# Altium PCB motor_driver_rev1.PcbDoc
Units mil, origin at the board's own origin, x right, y up, seen from the top; angles counter-clockwise.
Board outline 1417.32 x 1417.32 mil, 2 copper layers (Top Layer, Bottom Layer); 35 components, 30 nets, 146 pads, 59 vias.
Unrouted connection lines stored in the file: 1.
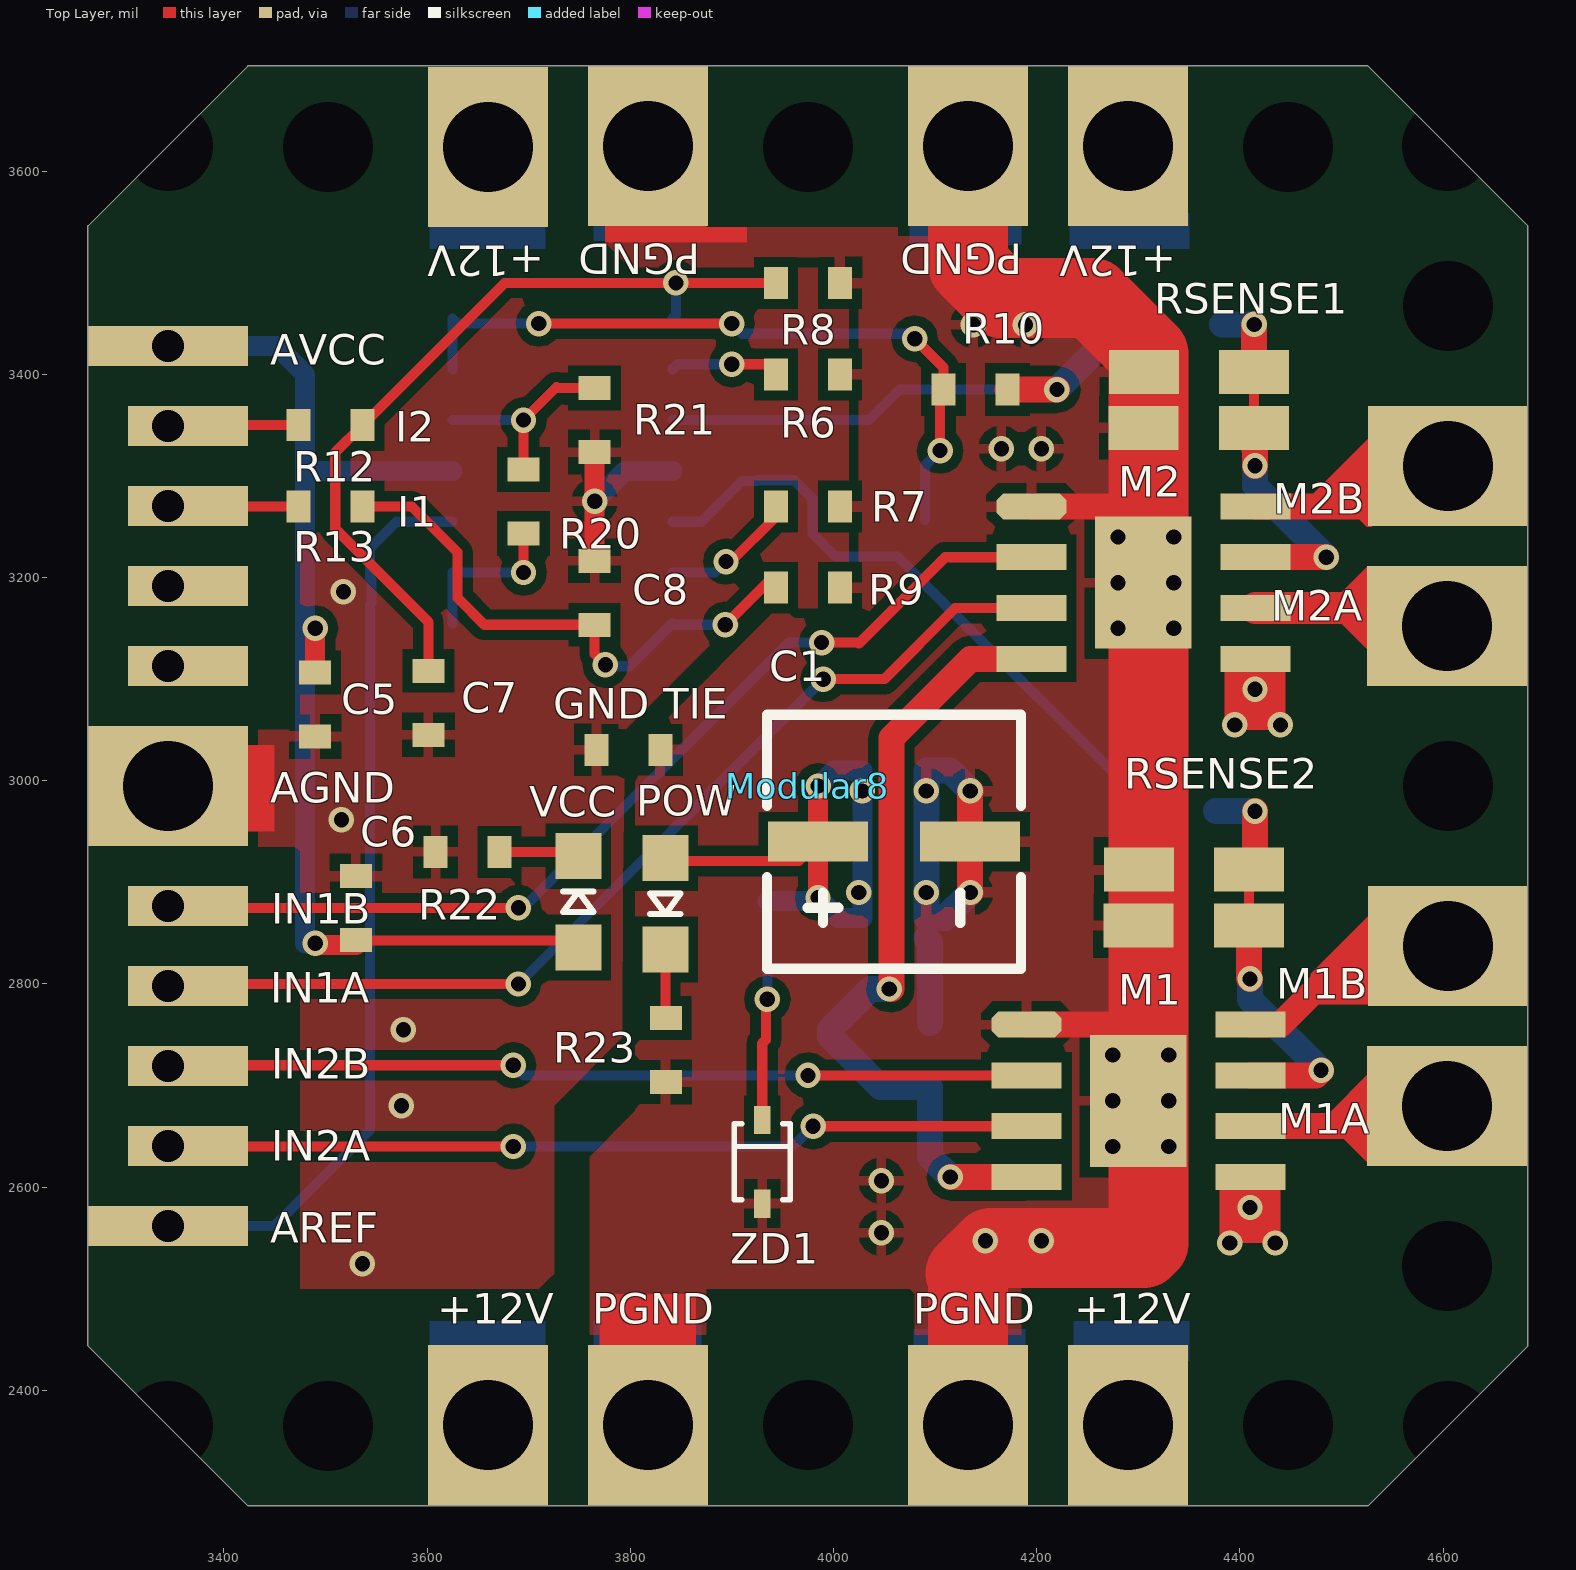
[diagram p0: Top Layer view]
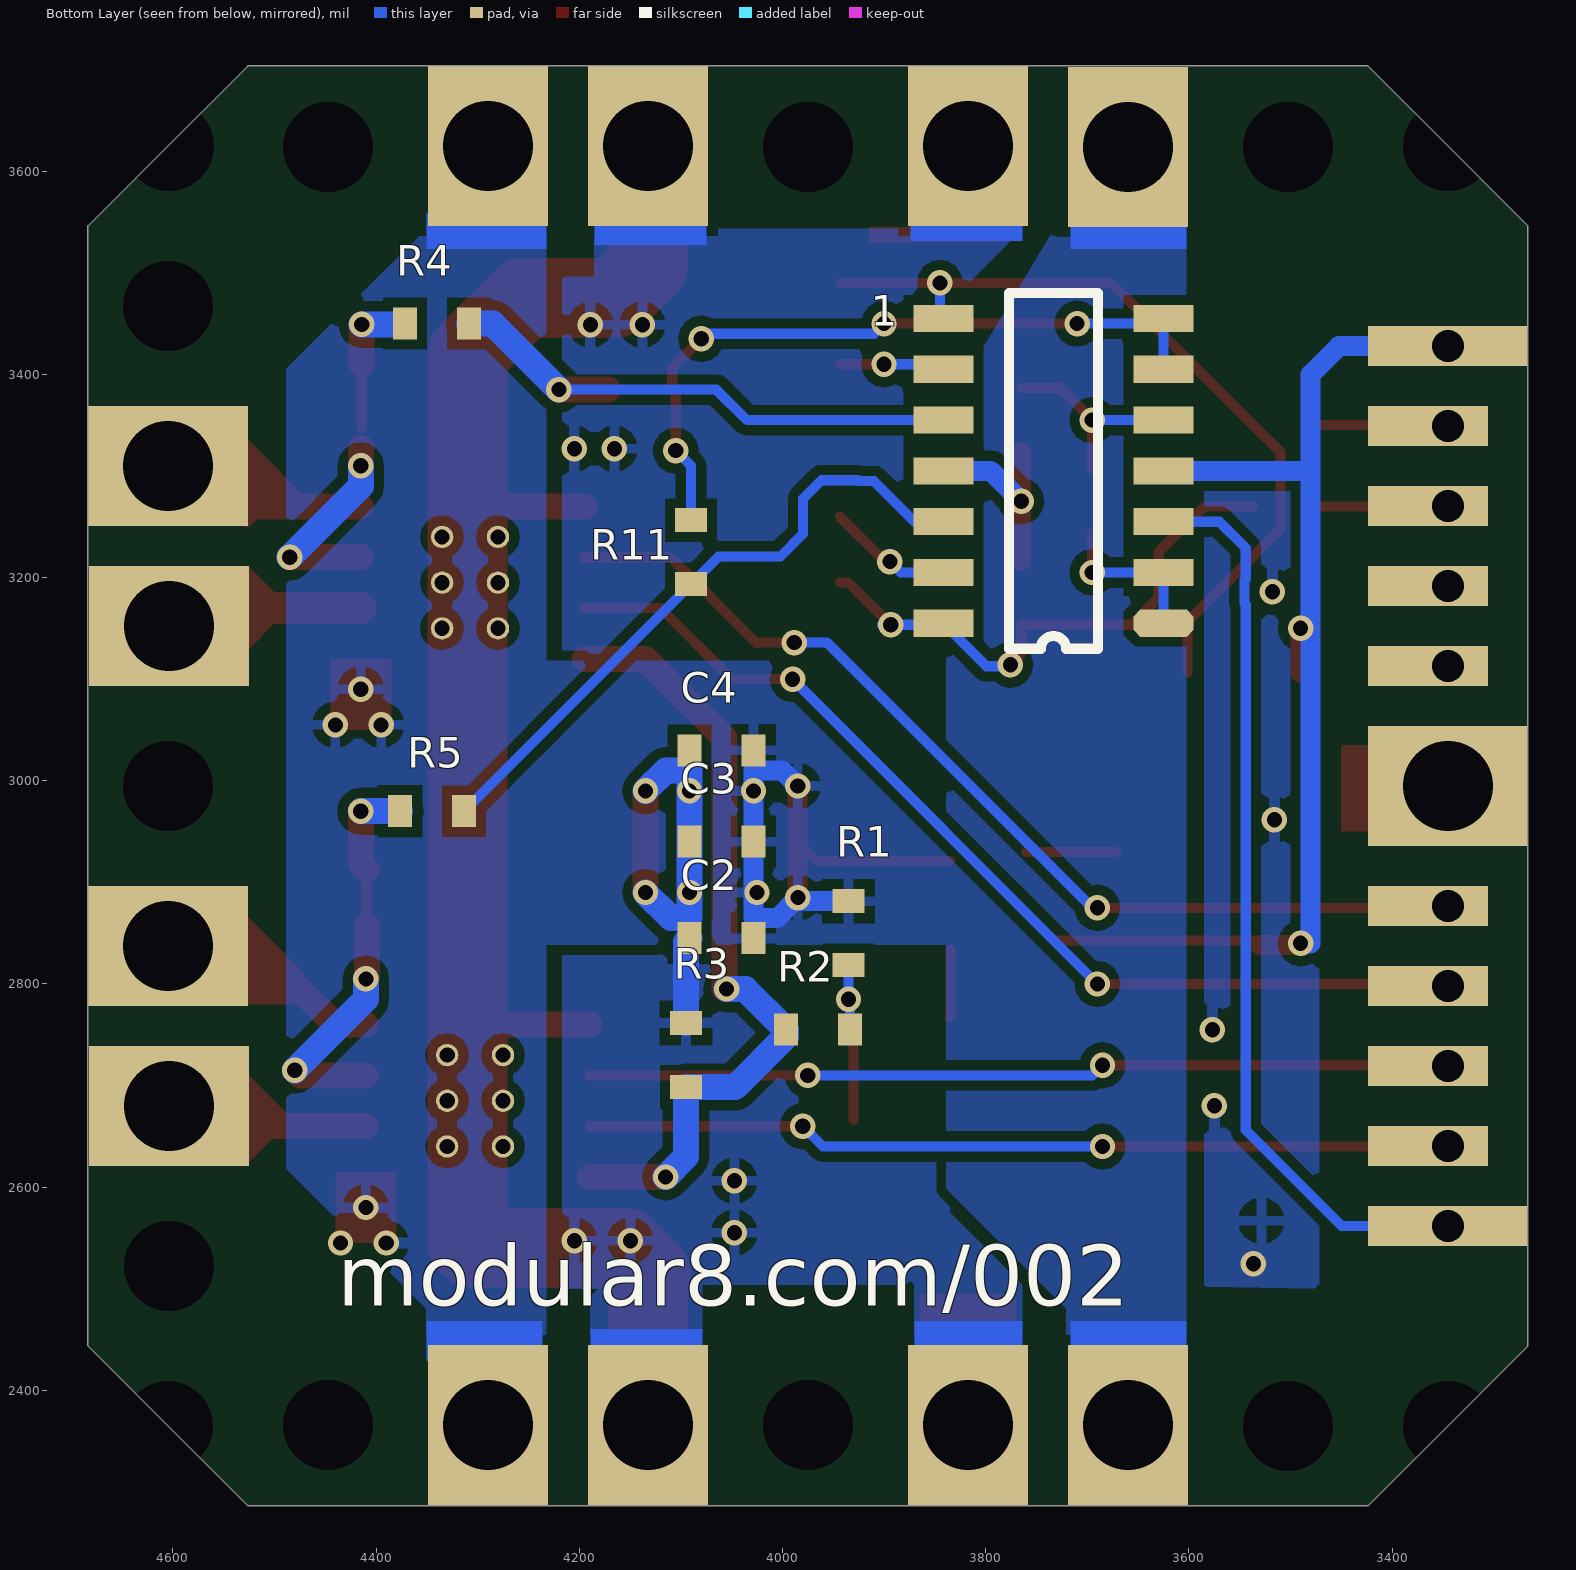
[diagram p1: Bottom Layer view, seen from below]

## Layer stack, top to bottom
Top Solder: solder mask 0.4, Solder Resist, Dk 3.5
Top Layer: signal copper 1.4
Dielectric 1: dielectric 12.6, FR-4, Dk 4.8
Bottom Layer: signal copper 1.4
Bottom Solder: solder mask 0.4, Solder Resist, Dk 3.5

## Board outline
3423.74,3703.58 3266.26,3546.1 3266.26,2443.74 3423.74,2286.26 4526.1,2286.26 4683.58,2443.74 4683.58,3546.1 4526.1,3703.58

## Design rules (kind name [scope] priority, off if disabled: settings)
Clearance [All] p1: gap=10
PolygonConnect [All] p1: connectstyle=Relief reliefconductorwidth=10 reliefentries=4 polygonreliefangle="90 Angle" airgapwidth=10
RoutingVias [All] p1: holewidth=28 width=50 viastyle="Through Hole" minholewidth=28 minwidth=50 maxholewidth=28 maxwidth=50
SolderMaskExpansion [All] p1: expansion=4
UnpouredPolygon [All] p1: allowunpoured=FALSE
Width [All] p1: maxlimit=118.11 minlimit=10 preferedwidth=10
29 further rules are at their usual default settings.

## Components (designator, comment, footprint, x,y, rotation, side; value= is the part's Value field where it differs from the comment)
1 "LM324DT" SO14 3625,3155 r0 bottom
C1 "C 100uF 25V" "RADIAL CAP 6.5MM" 4059.8,2940 r90 top
C2 "C 10uF 25V" 0603 4060,2845 r0 bottom
C3 "C 1uF 25V" 0603 4060,2940 r0 bottom
C4 "C 0.1uF 25V" 0603 4060,3030 r0 bottom
C5 "C 0.1uF 25V" 0603 3490,3075 r270 top
C6 "C 0.1uF 25V" 0603 3530,2874.69 r90 top
C7 "C 22uF 6.3V" 0603 3601.38,3076.77 r270 top
C8 "C 22uF 6.3V" 0603 3765,3185 r90 top
"GND TIE" "R 0" 0603 3798.23,3030.51 r180 top
M1 "A4950" "SOICN8 THERMAL PAD" 4190,2760 r0 top
M2 "A4950" "SOICN8 THERMAL PAD" 4195,3270 r0 top
Modular8 "modular8_power" "modular8 metric power" 3345,2365 r0 top locked
POW "LEDG" "0805 - LED" 3834.65,2878.94 r270 top (schematic designator "POW ON")
R1 "R 10k" 0603 3935,2850 r270 bottom
R2 "R 10k" 0603 3965,2755 r0 bottom
R3 "R 330" 0603 4095,2730 r90 bottom
R4 "R 10k 1%" 0603 4340,3450 r180 bottom
R5 "R 10k 1%" 0603 4345,2970 r180 bottom
R6 "R 10k 1%" 0603 3975,3400 r0 top
R7 "R 10k 1%" 0603 3975,3270 r0 top
R8 "R 300k 1%" 0603 3975,3490 r180 top
R9 "R 300k 1%" 0603 3975,3190 r180 top
R10 "R 300k 1%" 0603 4140,3385 r180 top
R11 "R 300k 1%" 0603 4090,3225 r90 bottom
R12 "R 10k" 0603 3505,3350 r180 top
R13 "R 10k" 0603 3505,3270 r180 top
R20 "R 300k 1%" 0603 3695,3275 r270 top
R21 "R 300k 1%" 0603 3765,3355 r270 top
R22 "R 680" 0603 3640,2930 r180 top
R23 "R 680" 0603 3835,2735 r270 top
RSENSE1 "R 0.01 0.5%" "1206 SPLIT" 4360,3375 r180 top
RSENSE2 "R 0.01 0.5%" "1206 SPLIT" 4355,2885 r180 top
VCC "LEDG" "0805 - LED" 3749.02,2880.91 r90 top (schematic designator "VCC ON")
ZD1 "Zener 5.1V" SOD-323F 3930,2625 r90 top

## Footprints (in the part's own frame and the unit in brackets; to place one, negate y for a bottom-side part, rotate by r counter-clockwise, add the part's x,y. Pads: shape width x height; smd on the part's side, far side on the other; paste and mask are expansions set on the pad)
0603 [mm]
  rect 0.6x0.8 smd: 1(-0.8,0) 2(0.8,0)
  body extent -1.2,-0.5 1.2,0.5, height 0.01
"0805 - LED" [mil]
  rect 45x45 smd: 1(-45,0) 2(45,0)
  silkscreen extent -10,-15 10,15, body extent -72,-27 72,27, height 0
"1206 SPLIT" [mm]
  rect 1.75x1.1 smd: 1(-1.375,-0.7) 1(-1.375,0.701) 2(1.375,-0.7) 2(1.386,0.701)
  body extent -2.35,-1.35 2.36,1.35
"modular8 metric power" [mm]
  rect 0x0 hole 2.25 unplated copper offset 0.5,0: 999(0,0) 999(0,32) 999(4,0) 999(4,31.976) 999(16,0.024) 999(16,31.976) 999(28,0.024) 999(28,31.976) 999(31.976,4) 999(31.976,32) 999(32,0) 999(32,16) 999(32,28)
  rect 3x1 hole 0.8 copper offset 0.5,0: A_0(0,25) A_1(0,23) A_2(0,21) A_3(0,19) A_4(0,13) A_5(0,11) A_6(0,9) A_7(0,7)
  rect 4x3 hole 2.25: A_GND(0,16) C_0(31.976,8) C_1(32,12) C_2(31.976,20) C_3(32,24)
  rect 4x1 hole 0.8: A_V1(0,27) A_V2(0,5)
  rect 3x4 hole 2.25: B_GND(12,0.024) B_GND(20,0.024) B_VCC(8,0.024) B_VCC(24,0.024) D_GND(12,32) D_GND(20,32) D_VCC(8,31.976) D_VCC(24,32)
  body extent -2,-2 34,34
"RADIAL CAP 6.5MM" [mm]
  rect 1x2.5 smd: 1(0,1.9) 2(0,-1.9)
  silkscreen extent -3.18,-3.18 3.18,3.18, body extent -3.3,-3.3 3.3,3.3
SO14 [mm]
  oct 1.5x0.677 smd: 1(0,0)
  rect 1.5x0.677 smd: 2(0,-1.27) 3(0,-2.54) 4(0,-3.81) 5(0,-5.08) 6(0,-6.35) 7(0,-7.62) 8(5.5,-7.62) 9(5.5,-6.35) 10(5.5,-5.08) 11(5.5,-3.81) 12(5.5,-2.54) 13(5.5,-1.27) 14(5.5,0)
  silkscreen extent 1.64,-8.25 3.86,0.64
SOD-323F [mm]
  rect 0.71x0.403 smd: 1(-1.045,0) 2(1.045,0)
  silkscreen extent -0.95,-0.7 0.95,0.7, body extent -1.4,-0.7 1.4,0.7
"SOICN8 THERMAL PAD" [mil]
  oct 68.9x25.59 smd: 1(0,0)
  round 22 hole 15 unplated: 1(85,-120) 1(85,-75) 1(85,-30) 1(140,-120) 1(140,-75) 1(140,-30)
  rect 95x130 smd: 1(110,-75)
  rect 68.9x25.59 smd: 2(0,-50) 3(0,-100) 4(0,-150) 5(220.47,-150) 6(220.47,-100) 7(220.47,-50) 8(220.47,0)
  body extent -38,-167 259,17

## Via types
v1: diameter 25, hole 15, Top Layer to Bottom Layer, 59 vias

## Nets (pads, with @x,y where several pads share a name; then routed paths per layer and width w, separated by ;. In a path a pad name is that pad's centre, name@x,y a point inside that pad or via, vN(x,y) a via of type N, cw(c..) or ccw(c..) an arc to the next point about the centre after c; other vN are vias at no path point)
2.048V: 1.6 1.7 R10.2 R11.2 | length 711.3
  Top Layer w10: v1(3710,3450) v1(3900,3450) ; v1(4080,3435) 4108.5,3406.5 R10.2 4105,3381.5 v1(4105,3325)
  Bottom Layer w10: 1.6 1.7 3630,3450 v1(3710,3450) ; v1(3900,3450) 3910,3440 4075,3440 v1(4080,3435) ; R11.2 4090,3310 v1(4105,3325)
4.096V: 1.3 Modular8.A_V2 | length 903.6
  Bottom Layer w10: Modular8.A_V2 3449.65,2561.85 3544.04,2656.24 3544.04,3173.46 3545.22,3174.63 3545.22,3197.41 3544.04,3198.59 3544.04,3229.04 3570,3255 1.3
5V: 1.4 C5.1 C6.1 Modular8.A_V1 VCC.1 | length 1136.6
  Top Layer w10: C6.1 3530,2842.66 VCC.1@3730.37,2842.66
  Top Layer w19.68: v1(3490,2840) 3491.5,2838.5 C6.1@3530,2838.5 ; C5.1 v1(3490,3150)
  Bottom Layer w19.68: Modular8.A_V1 3452.01,3427.99 3480.08,3399.92 3480.08,3305 ; v1@3480.08,2840 3480.08,3305 ; 1.4 3480.08,3305
+12V: C1.1 C2.1 C3.1 C4.1 M1.5 M2.5 Modular8.B_VCC Modular8.D_VCC POW.1 R1.1 | length 565.8
  Top Layer w10: POW.1@3835,2921 3966,2921 C1.1
  Top Layer w19.68: v1(3984.8,2885) 3985,2885.2 C1.1 v1(3985,2994.8)
  Bottom Layer w19.68: R1.1 3981.3,2881.5 v1(3984.8,2885) 4004.8,2865 4028.5,2865 C3.1 4028.5,3010 4000.2,3010 v1(3985,2994.8)
  other v1: 4390,2545 4435,2545 4410,2580 4025,2890 4028.5,2990 4395,3055 4440,3055 4415,3090
AGND: 1.11 "GND TIE.2" C5.2 C6.2 C7.2 C8.2 Modular8.A_GND R21.2 R22.2 | length 196
  Top Layer w19.68: C8.2 v1(3765,3275) R21.2
  Bottom Layer w19.68: v1(3765,3275) 3795,3305 1.11
  other v1: 3536.42,2524.61 3574.8,2680.12 3576.77,2754.92 3515.75,2961.61 3517.72,3186.02
CURRENT1: Modular8.A_1 R13.2 | length 128.7
  Top Layer w10: Modular8.A_1 3345.51,3270 R13.2
CURRENT2: Modular8.A_0 R12.2 | length 128.8
  Top Layer w10: Modular8.A_0 3345.75,3350 R12.2
M1A: M1.6 Modular8.C_0 | length 201.7
  Top Layer w25.59: M1.6 4583.93,2660 Modular8.C_0
M1B: M1.8 Modular8.C_1 | length 226.4
  Top Layer w25.59: M1.8 4440,2760 4517.44,2837.44 Modular8.C_1
M2A: M2.6 Modular8.C_2 | length 227.4
  Top Layer w31.5: M2.6 4586.29,3170 Modular8.C_2 Modular8.C_2@4581.49,3130
M2B: M2.8 Modular8.C_3 | length 260.9
  Top Layer w25.59: M2.8 4564.96,3270 Modular8.C_3 Modular8.C_3@4549.88,3309.88
Net1_1: 1.1 1.2 R20.2 | length 158.5
  Top Layer w10: v1(3695,3205) R20.2
  Bottom Layer w10: 1.1 1.2 v1(3695,3205)
Net1_5: 1.5 R20.1 R21.1 | length 202.4
  Top Layer w10: R20.1 v1(3695,3355) 3727.5,3387.5 3728.5,3386.5 R21.1
  Bottom Layer w10: 1.5 v1(3695,3355)
Net1_8: 1.8 C7.1 R8.2 R12.1 | length 794
  Top Layer w10: C7.1@3601.38,3106.5 3601.38,3156.35 3509.69,3248.04 3509.69,3323.19 R12.1 3676.5,3490 v1(3845,3490) R8.2
  Bottom Layer w10: 1.8 3845,3458.46 v1(3845,3490)
Net1_9: 1.9 R6.1 | length 104
  Top Layer w10: v1(3900,3410) R6.1@3943.5,3410
  Bottom Layer w10: 1.9 3846.54,3410 v1(3900,3410)
Net1_10: 1.10 R4.2 R10.1 | length 554.8
  Top Layer w25.59: R10.1 v1(4220,3385)
  Bottom Layer w10: 1.10 4035,3355 4065,3385 v1(4220,3385)
  Bottom Layer w25.59: v1(4220,3385) 4285,3450 R4.2
Net1_12: 1.12 R5.2 R11.1 | length 644
  Bottom Layer w10: 1.12 3870,3255 3910,3295 3924.73,3295 3925.48,3295.75 3961.53,3295.75 3979.69,3277.59 3979.69,3243.04 4001.98,3220.75 4062.76,3220.75 R11.1 R5.2
Net1_13: 1.13 R7.1 | length 124.8
  Top Layer w10: v1(3894.25,3215.75) 3899.25,3215.75 R7.1@3943.5,3260
  Bottom Layer w10: 1.13 3883.5,3205 v1(3894.25,3215.75)
Net1_14: 1.14 C8.1 R9.2 R13.1 | length 559.2
  Top Layer w10: R13.1 3585,3270 3630,3225 3630,3180 3656.5,3153.5 C8.1 3765,3124.76 v1(3775.59,3114.17) ; v1(3893.5,3153.5) 3935,3195 R9.2@3943.5,3195
  Bottom Layer w10: v1(3775.59,3114.17) 3777.09,3112.68 3799.21,3112.68 1.14 3843.03,3153.5 v1(3893.5,3153.5) v1@3902.01,3153.5
NetM1_2: M1.2 Modular8.A_6 | length 854.4
  Top Layer w10: Modular8.A_6 3345.67,2720 v1(3685,2720) ; v1(3975,2710) M1.2
  Bottom Layer w10: v1(3685,2720) 3695,2710 v1(3975,2710) v1@3975,2715
NetM1_3: M1.3 Modular8.A_7 | length 874.7
  Top Layer w10: Modular8.A_7 3345.59,2640 v1(3685,2640) ; v1(3980,2660) M1.3
  Bottom Layer w10: Modular8.A_7@3345.59,2640 Modular8.A_7 Modular8.A_7@3359.41,2655 ; v1(3685,2640) 3960,2640 v1(3980,2660)
NetM1_4: M1.4 M2.4 R2.2 R3.1 | length 789.8
  Top Layer w25.59: v1@4057.01,2795 4057.01,3042.01 4135,3120 M2.4 ; v1@4115.09,2610 M1.4
  Bottom Layer w25.59: v1(4055,2795) 4036.5,2795 R2.2 3996.5,2748.5 4046.5,2698.5 R3.1 4095,2630 v1(4115,2610)
NetM1_7: M1.7 R5.1 RSENSE2.1 | length 396.9
  Top Layer w10: RSENSE2.1@4409.13,2857.4 RSENSE2.1@4409.13,2912.56
  Top Layer w25.59: RSENSE2.1@4409.13,2857.4 4409.13,2805.87 v1(4410,2805) ; RSENSE2.1@4409.13,2912.56 4415,2918.43 v1(4415,2970) ; M1.7 4475,2710 v1(4480,2715)
  Bottom Layer w25.59: R5.1 v1(4415,2970) ; v1(4410,2805) 4410,2785 v1(4480,2715)
NetM2_2: M2.2 Modular8.A_4 | length 971.4
  Top Layer w10: Modular8.A_4 Modular8.A_4@3346.81,2875 ; Modular8.A_4@3370,2874.69 3689.69,2874.69 v1(3690,2875) ; v1(3988.38,3135.98) 4024.02,3135.98 4025,3135 4110,3220 M2.2
  Bottom Layer w10: v1(3690,2875) 3695,2875 3955.98,3135.98 v1(3988.38,3135.98)
NetM2_3: M2.3 Modular8.A_5 | length 1004.1
  Top Layer w10: Modular8.A_5 3346.93,2800 v1(3690,2800) ; v1(3990,3100) 4050,3100 4120,3170 M2.3
  Bottom Layer w10: v1(3690,2800) v1(3990,3100)
NetM2_7: M2.7 R4.1 RSENSE1.1 | length 332.3
  Top Layer w10: RSENSE1.1@4414.13,3347.4 RSENSE1.1@4414.13,3402.56
  Top Layer w25.59: RSENSE1.1@4414.13,3327.4 4415,3326.54 v1(4415,3310) ; RSENSE1.1@4414.13,3410 v1(4414.13,3449.13) ; M2.7 v1(4485,3220)
  Bottom Layer w25.59: R4.1@4382.36,3449.13 v1(4414.13,3449.13) ; v1(4415,3310) 4415,3290 v1(4485,3220)
"NetPOW ON_2": POW.2 R23.1 | length 67.6
  Top Layer w10: POW.2 3834.65,2766.85 R23.1
NetR1_2: R1.2 R2.1 ZD1.2 | length 185.1
  Top Layer w10: ZD1.2 3930,2741.5 3933.5,2745 3933.5,2783.5 v1(3935,2785)
  Bottom Layer w10: R2.1 3933.5,2783.5 v1(3935,2785) R1.2
NetR22_1: R22.1 VCC.2 | length 88.5
  Top Layer w10: R22.1 VCC.2@3760,2930
PGND: "GND TIE.1" C1.2 C2.2 C3.2 C4.2 M1.1 M2.1 Modular8.B_GND Modular8.D_GND R3.2 R6.2 R7.2 R8.1 R9.1 R23.2 RSENSE1.2 RSENSE2.2 ZD1.1 | length 2230.2
  Top Layer w25.59: v1(4134.8,2890) 4134.61,2890.2 C1.2 4134.61,2989.8 v1(4134.8,2990) ; M1.1@4190,2760 4305,2760 4310,2755 ; M2.1@4195,3270 4305,3270 4310,3275 ; M2.1@4305,3230 M2.1@4310,3235
  Top Layer w78.74: Modular8.B_GND@4132.4,2365.95 4132.4,2512.6 4130,2515 4155,2540 4305,2540 4310,2545 4310,2755 4310,3235 4310,3275 4310,3420 4255,3475 4165,3475 4132.4,3507.6 Modular8.D_GND@4132.4,3624.84
  Bottom Layer w25.59: C2.2 4095,2841.5 R3.2 ; v1(4134.8,2890) 4109.8,2865 4091.5,2865 v1(4091.5,2890) C3.2 4091.5,3010 4114.8,3010 v1(4134.8,2990)
  other v1: 4149.61,2547.24 4204.72,2547.24 4047.24,2555.12 4047.24,2606.3 4091.5,2990 4165.35,3326.77 4204.72,3326.77 4137.8,3448.82 4188.98,3448.82
pads on no net: Modular8.999 Modular8.A_2 Modular8.A_3

## Polygon pours and split planes (outlines as drawn)
PGND on Top Layer "Bottom Layer-No Net" (solid, remove dead copper, pour order 4): 3845,3570 3760,3545 3806.97,3498.03 3875,3498.03 3968.21,3456.79 3968.21,3193.21 3805,3030 3805,2675 3760,2630 3760,2430 3875,2430 3875,2500 4075,2500 4080,2495 4080,2425 4175,2425 4185,2435 4185,2540 4305,2540 4310,2545 4310,3420 4290,3420 4235,3475 4202.4,3507.6 4132.4,3507.6 4132.4,3565 4122.4,3555 4075,3555 4075,3545 3880,3545 3855,3570
AGND on Top Layer "Bottom Layer-No Net" (solid, remove dead copper, pour order 6): 3415,2935 3470,2935 3475,2930 3475,2500 3710,2500 3720,2510 3725,2515 3725,2675 3725,2680 3792.32,2747.32 3792.85,2896.42 3795,3050 3915,3170 3920,3170 4015,3170 4020,3175 4015,3180 4015,3280 4015,3285 4015,3505 3795,3505 3475,3505 3475,3055 3480,3050 3395,3050 3395,2950
PGND on Bottom Layer "Bottom Layer-No Net" (solid, remove dead copper, pour order 21): 3763.78,3543.31 3834.65,3472.44 3834.65,3425.2 3834.65,2574.8 3826.77,2566.93 3763.78,2503.94 3763.78,2496.06 3763.78,2429.13 3767.72,2425.2 3779.53,2437.01 3870.08,2437.01 3870.08,2503.94 3874.02,2507.87 3877.95,2503.94 4078.74,2503.94 4078.74,2425.2 4082.68,2429.13 4188.98,2429.13 4188.98,2492.13 4181.1,2500 4216.54,2500 4216.54,3500 4212.6,3496.06 4185.04,3496.06 4185.04,3552.89 4092.34,3549.39 4074.8,3543.31
+12V on Bottom Layer "Bottom Layer-No Net" (solid, remove dead copper, pour order 19): 3740.16,3118.11 3740.16,2834.65 3744.09,2830.71 3751.97,2838.58 4346.46,2838.58 4346.46,3118.11
+12V on Bottom Layer "Bottom Layer-No Net" (solid, remove dead copper, pour order 14): 3602.36,3562.99 3602.36,2421.26 3720.47,2421.26 3720.47,2480.32 3838.58,2598.43 3838.58,3346.46 3838.58,3366.14 3720.47,3562.99
+12V on Bottom Layer "Bottom Layer-No Net" (solid, remove dead copper, pour order 12): 4350.39,3562.99 4350.39,3543.31 4488.19,3405.51 4488.19,2618.11 4350.39,2480.32 4350.39,2421.26 4232.28,2421.26 4232.28,2480.32 4232.28,3562.99
AGND on Bottom Layer "Bottom Layer-No Net" (solid, remove dead copper, pour order 8): 3471.46,2500 3471.46,3496.06 3473.43,3498.03 3475.39,3500 3584.65,3500 3584.65,2503.94 3582.68,2501.97

## Other copper
Top Layer:
  rectangle net AGND: 3410,2950 3450,3035
  rectangle net PGND: 3860,3530 3915,3545
  rectangle net PGND: 3775,3530 3875,3560
  rectangle net PGND: 3770,2425 3865,2495
  rectangle net +12V: 4380,2545 4440,2615
  rectangle net +12V: 4385,3050 4445,3120
  region net M1A: 4525,2625 4485,2665 4485,2670 4530,2715 4530,2625
  region net M1B: 4470,2780 4470,2810 4535,2875 4535,2780
  region net M2B: 4525,3250 4495,3280 4470,3280 4530,3340 4530,3250
  region net M2A: 4525,3210 4495,3180 4495,3155 4500,3155 4525,3130 4535,3130 4540,3135 4540,3210
Bottom Layer:
  rectangle net PGND: 4078.74,2433.07 4188.98,2460.63
  rectangle net PGND: 3763.78,2437.01 3870.08,2468.5
  rectangle net PGND: 4074.8,3527.56 4185.04,3551.18
  rectangle net PGND: 3763.78,3531.5 3874.02,3551.18
  rectangle net +12V: 3602.36,3523.62 3716.54,3555.12
  rectangle net +12V: 4232.28,3523.62 4350.39,3559.06
  rectangle net +12V: 4236.22,2429.13 4350.39,2468.5
  rectangle net +12V: 3602.36,2429.13 3716.54,2468.5

## Silkscreen, mask and mechanical layers (free items; w line width, h text height)
Top Overlay:
  text "PGND" at 3869.09,3528.54 h30 r180
  text "PGND" at 4186.02,3528.54 h30 r180
  text "+12V" at 3715.55,3526.57 h30 r180
  text "+12V" at 4337.6,3526.57 h30 r180
  text "AVCC" at 3445.87,3409.45 h30
  text "I2" at 3568.9,3333.66 h30
  text "M2B" at 4433.07,3262.8 h30
  text "I1" at 3570.87,3250 h30
  text "M2A" at 4431.1,3157.48 h30
  text "AGND" at 3445.87,2978.35 h30
  text "IN1B" at 3446.85,2859.25 h30
  text "M1B" at 4436.02,2785.43 h30
  text "IN1A" at 3445.87,2781.5 h30
  text "IN2B" at 3446.85,2706.69 h30
  text "M1A" at 4437.99,2652.56 h30
  text "IN2A" at 3446.85,2625.98 h30
  text "AREF" at 3445.87,2545.28 h30
  text "+12V" at 3610.24,2465.55 h30
  text "PGND" at 3762.8,2465.55 h30
  text "PGND" at 4078.74,2465.55 h30
  text "+12V" at 4237.2,2465.55 h30
Bottom Overlay:
  text "modular8.com/002" at 4437.99,2483.27 h60